# EAGLE board esp_mod1 (EAGLE 7.2.0)
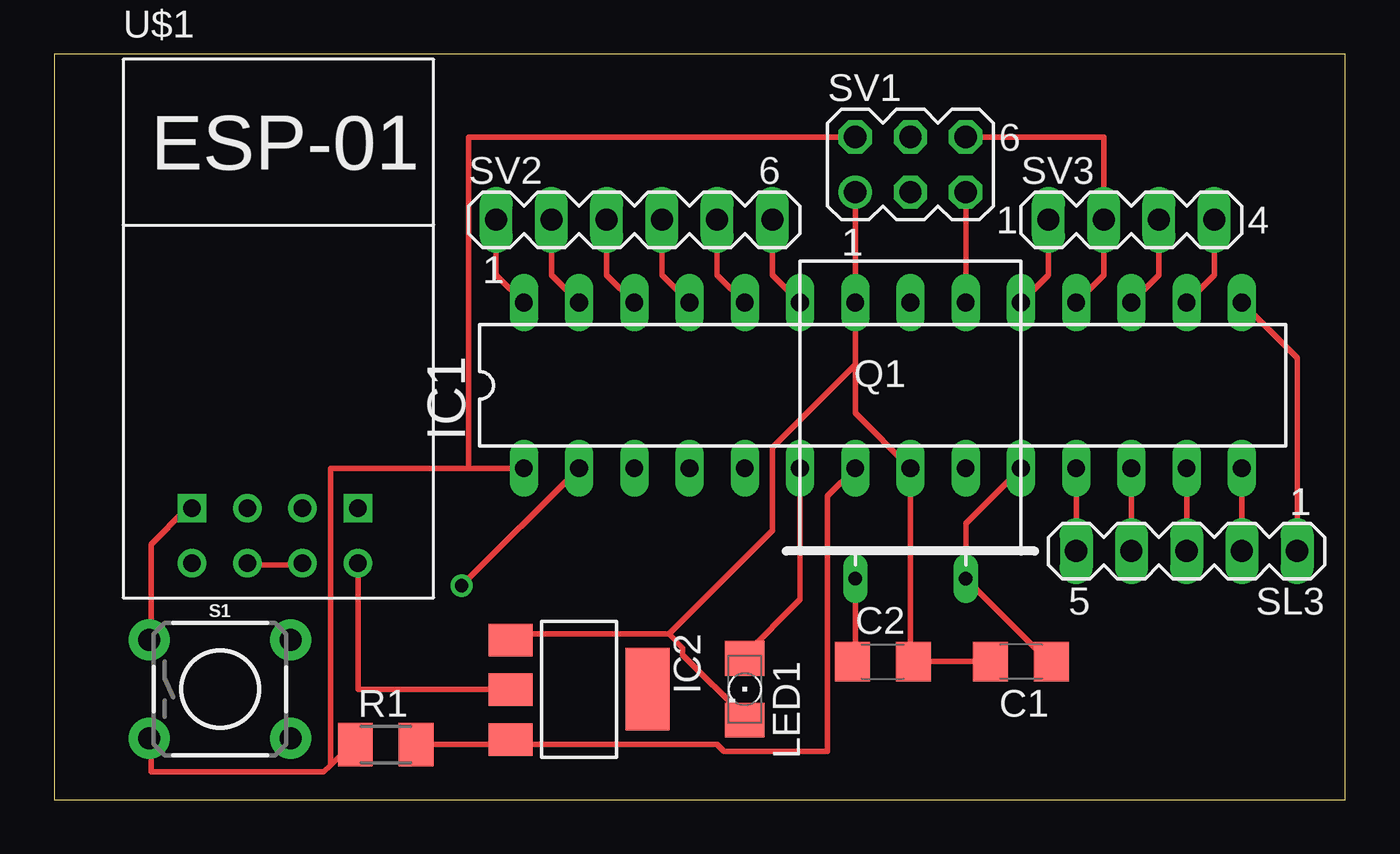
[diagram p0: board, top side]
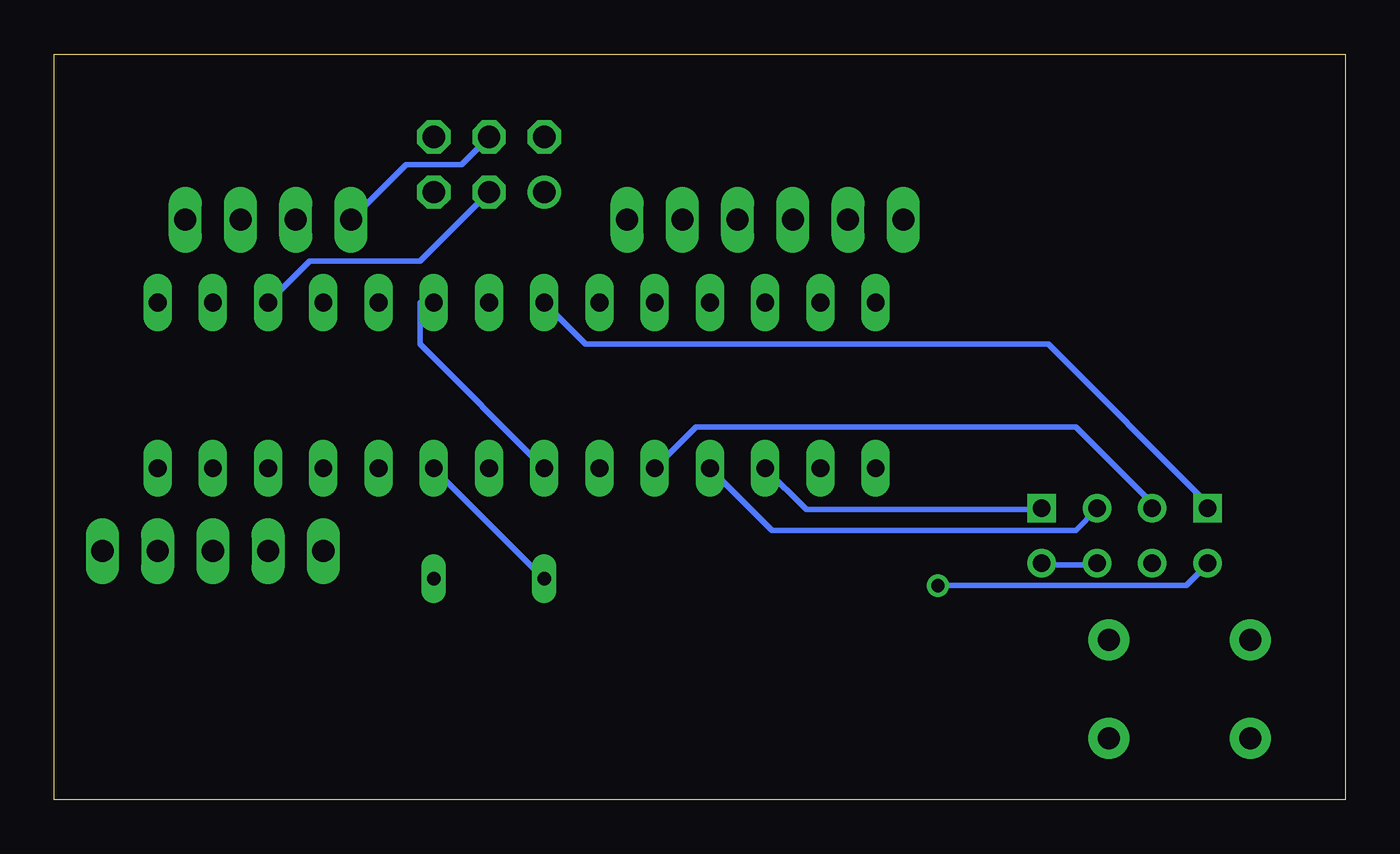
[diagram p1: board, bottom side, seen from below]

Size 59.36 x 34.28 mm. Coordinates in mm from the lower left corner, seen from the top.
Outline: 0,0 59.36,0 59.36,34.28 0,34.28 0,0
Copper layers (1*16): Top 0.035mm / dielectric 1.5mm / Bottom 0.035mm
Design rules "default": minimum track width 10mil, minimum drill 24mil, track to track 8mil, track to pad 8mil, pad to pad 8mil, via to via 8mil, smd to smd 8mil, copper to edge 40mil, drill to drill 8mil, minimum pad ring 10mil, minimum via ring 8mil, stop-mask expansion 4mil, vias tented up to drill 0mil, thermal gap 10mil

## Footprints (pad centres in the part's own frame; a part is rotated, then mirrored left to right if it is on the bottom)
C1206 = smd 1.6 x 1.8: 1 -1.4,0; 2 1.4,0
DIL28-3 = drill 0.813 long: 1 -16.51,-3.81; 2 -13.97,-3.81; 3 -11.43,-3.81; 4 -8.89,-3.81; 5 -6.35,-3.81; 6 -3.81,-3.81; 7 -1.27,-3.81; 8 1.27,-3.81; 9 3.81,-3.81; 10 6.35,-3.81; 11 8.89,-3.81; 12 11.43,-3.81; 13 13.97,-3.81; 14 16.51,-3.81; 15 16.51,3.81; 16 13.97,3.81; 17 11.43,3.81; 18 8.89,3.81; 19 6.35,3.81; 20 3.81,3.81; 21 1.27,3.81; 22 -1.27,3.81; 23 -3.81,3.81; 24 -6.35,3.81; 25 -8.89,3.81; 26 -11.43,3.81; 27 -13.97,3.81; 28 -16.51,3.81
SOT223 = smd 1.499 x 2.007: 1 -2.261,-3.15; 2 0.025,-3.15; 3 2.311,-3.15 | smd 3.81 x 2.007: 4 0,3.15
LED_1206 = smd 1.6 x 1.803: A -1.422,0; C 1.422,0
Q = drill 0.61 long: 1 -2.54,-7.62; 2 2.54,-7.62
M1206 = smd 1.6 x 2: 1 -1.4,0; 2 1.4,0
TACTILE_SWITCH_PTH_6.0MM = drill 1.016 pad 1.88: 1 -3.251,2.261; 2 3.251,2.261; 3 -3.251,-2.261; 4 3.251,-2.261
MA05-1 = drill 1.016 long: 1 -5.08,0; 2 -2.54,0; 3 0,0; 4 2.54,0; 5 5.08,0
MA03-2 = drill 1.016: 1 -2.54,-1.27 | drill 1.016 octagon: 2 -2.54,1.27; 3 0,-1.27; 4 0,1.27; 5 2.54,-1.27; 6 2.54,1.27
MA06-1 = drill 1.016 long: 1 -6.35,0; 2 -3.81,0; 3 -1.27,0; 4 1.27,0; 5 3.81,0; 6 6.35,0
MA04-1 = drill 1.016 long: 1 -3.81,0; 2 -1.27,0; 3 1.27,0; 4 3.81,0
ESP01 = drill 0.8: CH_PD -1.285,-8.178; GPIO0 1.255,-5.638; GPIO2 -1.285,-5.638; RST 1.255,-8.178; TX -3.825,-8.178; VCC 3.795,-8.178 | drill 0.8 square: GND -3.825,-5.638; RX 3.795,-5.638

## Placement (x,y rotation side)
C1  [C1206]  44.45,6.35 180 top
C2  [C1206]  38.1,6.35 0 top
IC1  MEGA8-P  [DIL28-3]  38.1,19.05 0 top
IC2  REG1117  [SOT223]  24.13,5.08 270 top
LED1  [LED_1206]  31.75,5.08 270 top
Q1  [Q]  39.37,17.78 0 top
R1  [M1206]  15.24,2.54 0 top
S1  [TACTILE_SWITCH_PTH_6.0MM]  7.62,5.08 0 top
SL3  [MA05-1]  52.07,11.43 180 top
SV1  [MA03-2]  39.37,29.21 0 top
SV2  [MA06-1]  26.67,26.67 0 top
SV3  [MA04-1]  49.53,26.67 0 top
U$1  ESP01  [ESP01]  10.16,19.05 0 top

## Library data of the parts
C1 C2 = eagle-ltspice; SPICEMODEL: NONE; SPICEPREFIX: C
IC1 = atmel; OC_FARNELL: unknown; OC_NEWARK: unknown
IC2 = burr-brown; MPN: REG1117; OC_FARNELL: 1097566; OC_NEWARK: 14P6981
LED1 = eagle-ltspice; SPICEMODEL: NONE; SPICEPREFIX: D; SPICETYPE: diode
Q1 = special
R1 = resistor
S1 = SparkFun-Switches; PROD_ID: SWCH-08441; SF_SKU: COM-00097
SL3 SV1-SV3 = con-lstb; OC_FARNELL: unknown; OC_NEWARK: unknown
U$1 = esp8266modules

## Nets
3.3V: IC2.2 U$1.CH_PD U$1.RST U$1.VCC
A0: IC1.23 SV2.6
A1: IC1.24 SV2.5
A2: IC1.25 SV2.4
A3: IC1.26 SV2.3
A4: IC1.27 SV2.2
A5: IC1.28 SV2.1
D4: IC1.6 LED1.A
D5: IC1.11 SL3.5
D6: IC1.12 SL3.4
D7: IC1.13 SL3.3
D8: IC1.14 SL3.2
D9: IC1.15 SL3.1
D10: IC1.16 SV3.4
GND: C1.2 C2.2 IC1.8 IC1.22 IC2.1 LED1.C S1.1 SV1.1 U$1.GND
GPIO0: IC1.4 U$1.GPIO0
GPIO2: IC1.5 U$1.GPIO2
MISO: IC1.18 SV1.6 SV3.2
MOSI: IC1.17 SV1.3 SV3.3
N$22: IC1.21
OSC1: C2.1 IC1.9 Q1.1
OSC2: C1.1 IC1.10 Q1.2
RESET: IC1.1 R1.1 S1.3 SV1.2
RX: IC1.3 U$1.RX
SCK: IC1.19 SV1.4 SV3.1
TX: IC1.2 U$1.TX
VCC: IC1.7 IC1.20 IC2.3 R1.2 SV1.5

## Tracks (layer width: path | path; a pad name or v marks a point on that pad's centre or on a via)
3.3V
  Top 0.254: U$1.CH_PD 8.89,10.79 11.11,10.79 U$1.RST | IC2.2 20.96,5.08 13.97,5.08 13.97,10.79 U$1.VCC
  Bottom 0.254: U$1.RST 11.43,10.79 13.65,10.79 U$1.VCC
A0
  Top 0.254: IC1.23 33.02,24.13 SV2.6
A1
  Top 0.254: IC1.24 30.48,24.13 SV2.5
A2
  Top 0.254: IC1.25 27.94,24.13 SV2.4
A3
  Top 0.254: IC1.26 25.4,24.13 SV2.3
A4
  Top 0.254: IC1.27 22.86,24.13 SV2.2
A5
  Top 0.254: IC1.28 20.32,24.13 SV2.1
D4
  Top 0.254: IC1.6 34.29,9.21 31.75,6.67 LED1.A
D5
  Top 0.254: SL3.5 IC1.11
D6
  Top 0.254: SL3.4 IC1.12
D7
  Top 0.254: SL3.3 IC1.13
D8
  Top 0.254: SL3.2 IC1.14
D9
  Top 0.254: IC1.15 57.15,20.32 SL3.1
D10
  Top 0.254: IC1.16 53.34,24.13 SV3.4
GND
  Top 0.254: 28.26,7.62 28.89,6.98 28.89,6.67 31.75,3.81 LED1.C | 28.26,7.62 21.27,7.62 IC2.1 | U$1.GND 6.03,13.34 4.45,11.75 4.45,7.62 S1.1 | C1.2 C2.2 39.37,6.35 IC1.8 36.83,17.78 36.83,20 | SV1.1 IC1.22 36.83,20 | 28.26,7.62 33.02,12.38 33.02,16.19 36.83,20
  Bottom 0.254: IC1.22 34.92,20.96 13.65,20.96 6.35,13.65 U$1.GND
GPIO0
  Bottom 0.254: IC1.4 26.35,12.38 12.38,12.38 11.43,13.34 U$1.GPIO0
GPIO2
  Bottom 0.254: IC1.5 29.85,17.14 12.38,17.14 8.89,13.65 U$1.GPIO2
MISO
  Top 0.254: IC1.18 48.26,24.13 SV3.2 48.26,30.48 SV1.6
MOSI
  Top 0.254: IC1.17 50.8,24.13 SV3.3
  Bottom 0.254: SV1.3 42.55,24.77 47.62,24.77 IC1.17
OSC1
  Top 0.254: Q1.1 36.83,6.35 C2.1
  Bottom 0.254: Q1.1 IC1.9
OSC2
  Top 0.254: C1.1 45.72,6.35 Q1.2 41.91,12.7 IC1.10
RESET
  Top 0.254: 12.7,1.59 12.38,1.27 4.45,1.27 4.45,2.54 S1.3 | 12.7,1.59 13.65,2.54 R1.1 | 19.05,15.24 12.7,15.24 12.7,1.59 | 19.05,15.24 IC1.1 | SV1.2 19.05,30.48 19.05,15.24
RX
  Bottom 0.254: IC1.3 24.76,13.34 13.97,13.34 U$1.RX
SCK
  Top 0.254: IC1.19 45.72,24.13 SV3.1
  Bottom 0.254: SV1.4 40.64,29.21 43.18,29.21 SV3.1
TX  (via drill 0.61)
  Top 0.254: IC1.2 v18.73,9.84
  Bottom 0.254: v18.73,9.84 7.3,9.84 6.35,10.79 U$1.TX
VCC
  Top 0.254: R1.2 20.96,2.54 IC2.3 21.27,2.54 30.48,2.54 30.8,2.22 35.56,2.22 35.56,13.97 IC1.7 | IC1.20 SV1.5
  Bottom 0.254: IC1.7 42.55,20.96 42.55,22.86 IC1.20